# Altium PCB finger_pogo.PcbDoc
Units mil, origin at the board's own origin, x right, y up, seen from the top; angles counter-clockwise.
Board outline 1535 x 780 mil, 2 copper layers (Top Layer, Bottom Layer), stack 60.8 mil thick; 4 components, 6 nets, 16 pads, 10 vias.
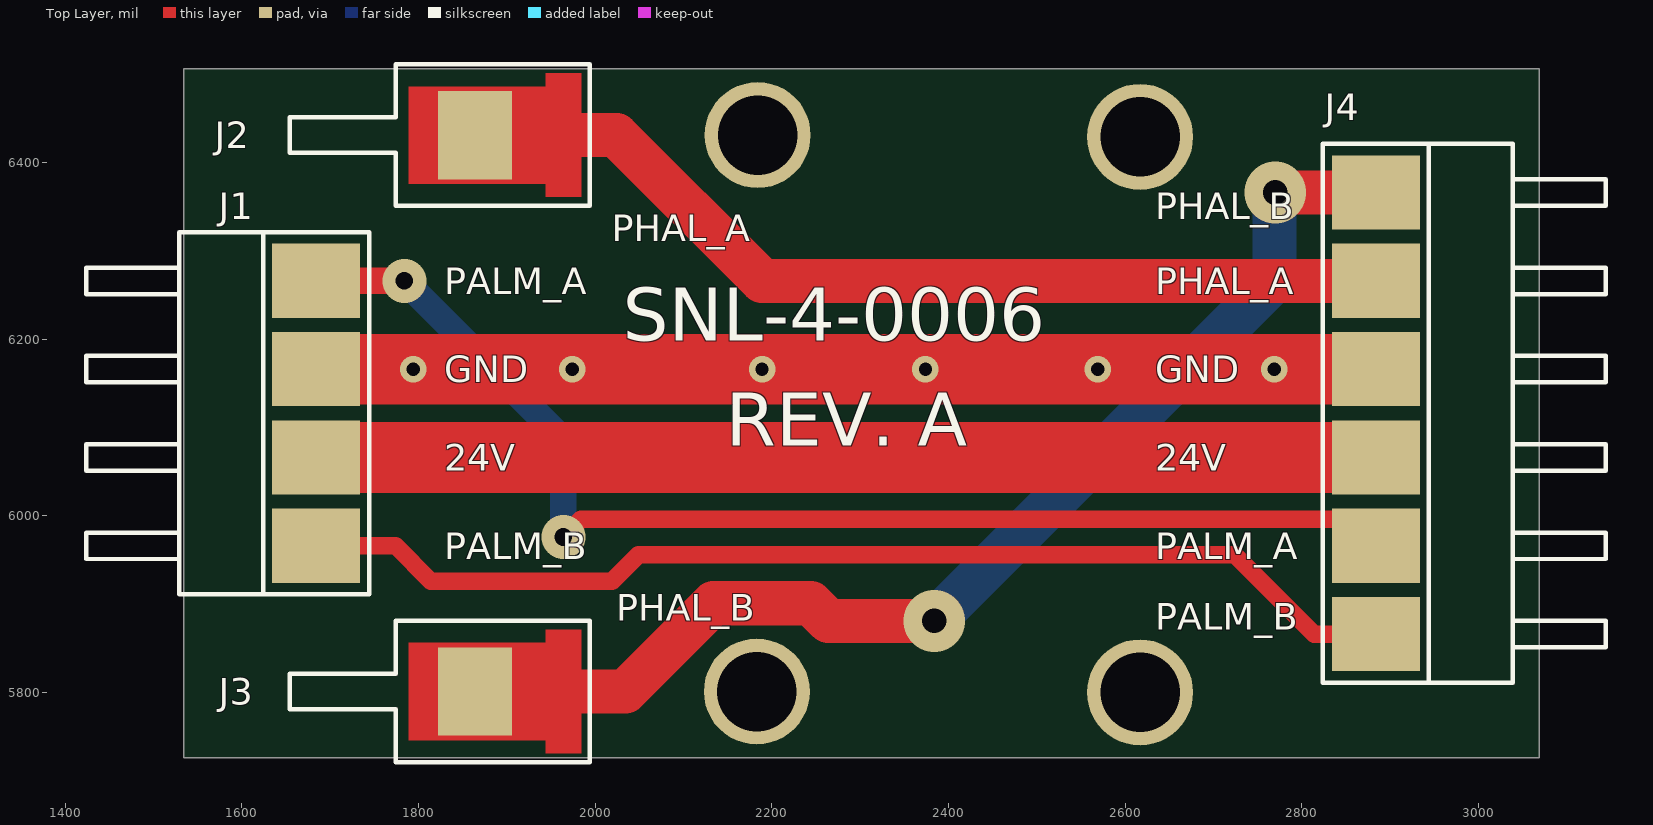
[diagram p0: Top Layer view]
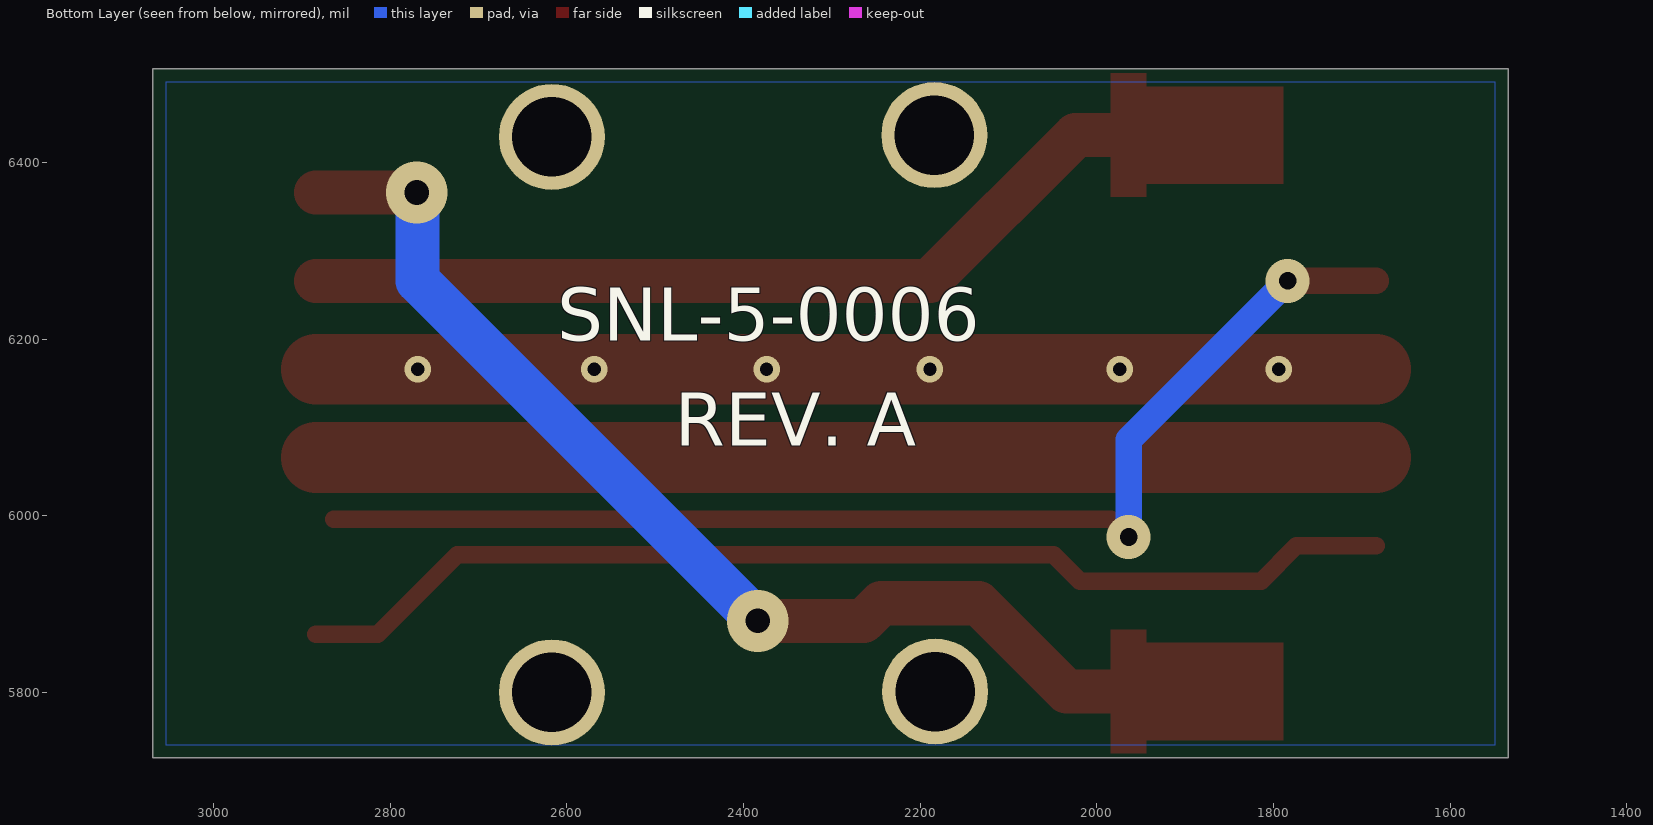
[diagram p1: Bottom Layer view, seen from below]

## Layer stack, top to bottom
Top Layer: signal copper 1.4
Dielectric: core 58, FR-4, Dk 4.8
Bottom Layer: signal copper 1.4

## Board outline
1534,5726 1534,6506 3069,6506 3069,5726

## Design rules (kind name [scope] priority, off if disabled: settings)
Clearance Clearance_1 [InNamedPolygon('gnd')] p1: gap=20
Clearance [All] p2: gap=10
MinimumSolderMaskSliver [All] p1: minsoldermaskwidth=5
PasteMaskExpansion [All] p1: expansion=-1
PlaneConnect [All] p1: planeconnectstyle=Direct reliefexpansion=20 reliefentries=4 reliefconductorwidth=10 reliefairgap=10
PolygonConnect [All] p1: connectstyle=Direct reliefconductorwidth=10 reliefentries=4 polygonreliefangle="90 Angle" airgapwidth=10
RoutingVias [All] p1: holewidth=8 width=20 viastyle="Through Hole" minholewidth=8 minwidth=20 maxholewidth=100 maxwidth=120
SilkToSilkClearance [All] p1: silktosilkclearance=5
SilkscreenOverComponentPads [All] p1: minsilkscreentomaskgap=5
SolderMaskExpansion [All] p1: expansion=3
Width [All] p1: maxlimit=100 minlimit=10 preferedwidth=10
23 further rules are at their usual default settings.

## Components (designator, comment, footprint, x,y, rotation, side; value= is the part's Value field where it differs from the comment)
J1 "Header 4" MILL-MAX-810-22-004-40-001101 1684,5966 r90 top
J2 "Plug" MILL_MAX-0967-0-15-20-75-14-11-0_6937-X 1984,6431 r180 top
J3 "Plug" MILL_MAX-0967-0-15-20-75-14-11-0_6937-X 1984.02,5801 r180 top
J4 "Header 6" MILL-MAX-810-22-006-40-001101 2884,6366 r270 top

## Footprints (in the part's own frame and the unit in brackets; to place one, negate y for a bottom-side part, rotate by r counter-clockwise, add the part's x,y. Pads: shape width x height; smd on the part's side, far side on the other; paste and mask are expansions set on the pad)
MILL-MAX-810-22-004-40-001101 [mil]
  rect 84x100 smd: 1(0,0) 2(100,0) 3(200,0) 4(300,0)
  silkscreen extent -55,-60 355,260, body extent -50,-37 350,260, height 100
MILL-MAX-810-22-006-40-001101 [mil]
  rect 84x100 smd: 1(0,0) 2(100,0) 3(200,0) 4(300,0) 5(400,0) 6(500,0)
  silkscreen extent -55,-60 555,260, body extent -50,-40 550,257, height 100
MILL_MAX-0967-0-15-20-75-14-11-0_6937-X [mil]
  rect 84x100 smd: 1(120,0)
  Top Layer region: 0,70 40,70 40,55 195,55 195,-55 40,-55 40,-70 0,-70
  silkscreen extent -10,-80 330,80, body extent -1,-77 330,77, height 100

## Part data
J1: "Header, 4-Pin"
J4: "Header, 6-Pin"

## Free pads (board coordinates)
  round 120 hole 90: MNT(2183,5801) MNT(2184,6431) MNT(2617,5800) MNT(2617,6429)

## Via types
v1: diameter 30, hole 15, Top Layer to Bottom Layer, tented both sides, 6 vias
v2: diameter 70, hole 28, Top Layer to Bottom Layer, tented both sides, 2 vias
v3: diameter 50, hole 20, Top Layer to Bottom Layer, tented both sides, 2 vias

## Nets (pads, with @x,y where several pads share a name; then routed paths per layer and width w, separated by ;. In a path a pad name is that pad's centre, name@x,y a point inside that pad or via, vN(x,y) a via of type N, cw(c..) or ccw(c..) an arc to the next point about the centre after c; other vN are vias at no path point)
24V: 
GND: 
PALM_A: 
PALM_B: 
PHAL_A: 
PHAL_B: 
pads on no net: J1.1 J1.2 J1.3 J1.4 J2.1 J3.1 J4.1 J4.2 J4.3 J4.4 J4.5 J4.6
copper on no net: | length 7392.5
  Top Layer w20: 1684,5966 1774,5966 1814,5926 2019,5926 2049,5956 2724,5956 2814,5866 2884,5866 ; v3(1964,5976) 1984,5996 2864,5996
  Top Layer w30: 1684,6266 v3(1784,6266)
  Top Layer w50: 1864,6431 2024,6431 2189,6266 2884,6266 ; 1928,5802 1929,5801 2034,5801 2134,5901 2244,5901 2264,5881 v2(2384,5881) ; v2(2770,6366) 2884,6366
  Top Layer w80: 1684,6066 2884,6066 ; 1684,6166 2884,6166
  Bottom Layer w30: v3(1784,6266) 1964,6086 v3(1964,5976)
  Bottom Layer w50: v2(2384,5881) 2769,6266 2769,6365 v2(2770,6366)
  other v1: 1794,6166 1974,6166 2189,6166 2374,6166 2569,6166 2769,6166

## Polygon pours and split planes (outlines as drawn)
no net on Bottom Layer "gnd" (solid, remove dead copper, pour order 2): 1549,6491 3054,6491 3054,5741 1549,5741

## Silkscreen, mask and mechanical layers (free items; w line width, h text height)
Top Overlay:
  text "PHAL_B" at 2634,6336 h30
  text "PHAL_A" at 2019,6311 h30
  text "PALM_A" at 1829,6251 h30
  text "PHAL_A" at 2634,6251 h30
  text "SNL-4-0006" at 2031,6198 h60
  text "GND" at 1829,6151 h30
  text "GND" at 2634,6151 h30
  text "REV. A" at 2148,6079 h60
  text "24V" at 1829,6051 h30
  text "24V" at 2634,6051 h30
  text "PALM_B" at 1829,5951 h30
  text "PALM_A" at 2634,5951 h30
  text "PHAL_B" at 2024,5881 h30
  text "PALM_B" at 2634,5871 h30
Bottom Overlay:
  text "SNL-5-0006" at 2611,6198 h60
  text "REV. A" at 2478,6079 h60
outline:
  the board outline again, w5
Mechanical 7:
  drawing of 323 lines, arcs and shapes, not listed
border:
  lines w5: 118.42,3889.87 318.42,3889.87 ; 118.42,5769.87 318.42,5769.87 ; 2494.42,141.87 2494.42,341.87 ; 2494.42,7441.87 2494.42,7641.87 ; 3512.25,342.82 3512.25,1542.82 4912.25,1542.82 ; 4866.42,141.87 4866.42,341.87 ; 4866.42,7441.87 4866.42,7641.87 ; 4912.25,342.82 4912.25,1542.82 ; 4912.25,642.82 9412.25,642.82 ; 4912.25,942.82 9412.25,942.82 ; 4912.25,1242.82 6412.25,1242.82 ; 6412.25,342.82 6412.25,942.82 6412.25,1542.82 ; 7243.42,141.87 7243.42,341.87 ; 7243.42,7441.87 7243.42,7641.87 ; 8512.25,342.82 8512.25,942.82 ; 9412.25,1542.82 6412.25,1542.82 ; 9418.42,2017.87 9618.42,2017.87 ; 9418.42,3889.87 9618.42,3889.87 ; 9418.42,5769.87 9618.42,5769.87 ; 4912.25,1542.82 6412.25,1542.82 ; 118.42,141.87 118.42,7641.87 9618.42,7641.87 9618.42,141.87 118.42,141.87 ; 318.42,341.87 9418.42,341.87 9418.42,7441.87 318.42,7441.87 318.42,341.87
  text "1" at 1290.75,7506.87 h70
  text "2" at 3648.77,7506.87 h70
  text "3" at 6025.42,7506.87 h70
  text "4" at 8400.77,7506.87 h70
  text "A" at 193.42,6616.87 h70
  text "A" at 9488.42,6616.87 h70
  text "B" at 193.42,4740.87 h70
  text "B" at 9488.42,4740.87 h70
  text "C" at 193.42,2864.87 h70
  text "C" at 9488.42,2864.87 h70
  text "ENGINEER:" at 4962.25,1442.82 h45
  text "TITLE:" at 6462.25,1442.82 h45
  text "M. Quigley" at 5012.84,1288.88 h100
  text "Finger Pogos" at 6508.91,1271.17 h100
  text "PCB DESIGNER:" at 4962.25,1147.82 h45
  text "M. Quigley" at 5018.75,1011.32 h100
  text "Open Source" at 3814.02,1005.42 h90
  text "D" at 193.42,992.87 h70
  text "D" at 9488.42,992.87 h70
  text "DATE:" at 4962.25,842.82 h45
  text "PART NO.:" at 6462.25,842.82 h45
  text "REV:" at 8562.25,842.82 h45
  text "Robotics Foundation" at 3605.36,838.09 h90
  text ".PRINT_DATE" at 5012.25,722.82 h70
  text "A" at 8605.36,692.43 h100
  text "FILE NAME:" at 4962.25,542.82 h45
  text "DWG NO:" at 6462.25,542.82 h45
  text "SCALE:" at 8562.25,542.82 h45
  text ".PCB_FILE_NAME_NO_PATH" at 5012.25,422.82 h70
  text "none" at 8611.27,403.06 h100
  text "1" at 1290.75,206.87 h70
  text "2" at 3648.77,206.87 h70
  text "3" at 6025.42,206.87 h70
  text "4" at 8400.77,206.87 h70
Drill Drawing:
  text ".legend" at 4184.3,1860.26 h60
fabrication:
  lines w10: 4177,6788.34 6127,6788.34
  text "NOTES: (UNLESS OTHERWISE SPECIFIED)" at 4202,6838.34 h70
  text "1.  ALL DIMENSIONS ARE IN MILLIMETERS UNLESS OTHERWISE NOTED." at 4352,6588.34 h70
  text "2.  FABRICATE PCB IN ACCORDANCE WITH LATEST IPC-6011 AND IPC-6012, CLASS 2." at 4352,6413.34 h70
  text "3.  MATERIALS:" at 4352,6238.34 h70
  text "LAMINATE MATERIAL MUST BE ABLE TO WITHSTAND A LEAD FREE PROFILE." at 4552,6113.34 h70
  text "USE HIGH TEMP FR-4 MATERIAL OR EQUIVALENT." at 4552,5988.34 h70
  text "MUST MEET UL 94V-0 FLAMMABILITY RATING." at 4552,5863.34 h70
  text "COPPER FOIL TO BE IN ACCORDANCE WITH IPC-MF-150, OUTER LAYER 1.0 OZ FINISHED." at 4552,5738.34 h70
  text "OVERALL THICKNESS TO BE .062\" +/- .005\"." at 4552,5613.34 h70
  text "4.  HOLE SIZES IN DRILL CHART ARE FINISHED DIAMETERS, AND IN INCHES." at 4343,5464.83 h70
  text "LAYER TO LAYER REGISTRATION SHALL BE WITHIN 0.003" at 4543,5339.83 h70
  text "ALL HOLES SHALL BE LOCATED WITHIN 0.003 RADIUS OF TRUE POSITION (RTP)." at 4543,5214.83 h70
  text "PLATED-THROUGH HOLES SHALL HAVE A TOLERANCE OF: +0.003/-0.003 FOR HOLE SIZES." at 4543,5089.83 h70
  text "5.  ALL PLATED-THROUGH HOLES AND CONDUCTIVE SURFACES SHALL BE PLATED WITH" at 4343,4914.83 h70
  text "A MINIMUM THICKNESS OF 0.001 COPPER." at 4543,4789.83 h70
  text "6.  FINISH:" at 4343,4614.83 h70
  text "SURFACE FINISH TO BE ELECTROLESS NICKEL/IMMERSION GOLD PER IPC-4552." at 4543,4489.83 h70
  text "NICKEL THICKNESS 120-240 MICROINCHES, GOLD THICKNESS 2.0-8.0 MICROINCHES." at 4543,4364.83 h70
  text "7.  SOLDER MASK:" at 4343,4189.83 h70
  text "GREEN LIQUID PHOTOIMAGEABLE (LPI) SOLDERMASK SHALL BE APPLIED PER" at 4533.16,4054.98 h70
  text "LATEST PC-SM-840, CLASS H, OVER BARE COPPER (SMOBC) TO BOTH SIDES OF THE BOARD." at 4533.16,3929.98 h70
  text "8.  SILKSCREEN:" at 4326.22,3764.06 h70
  text "SHALL BE APPLIED WITH WHITE NON-CONDUCTIVE PERMANENT EPOXY INK." at 4526.22,3639.06 h70
  text "THERE SHALL BE NO SILKSCREEN ON ANY SOLDERABLE COMPONENT PAD." at 4526.22,3514.06 h70
  text "9.  TOLERANCES:" at 4326.22,3339.06 h70
  text "BOW AND TWIST OF THE BOARD SHALL NOT EXCEED 0.75%." at 4526.22,3214.06 h70
  text "CONDUCTOR WIDTHS AND SPACING SHALL BE WITHIN +/-0.002 OF GERBER DATA." at 4526.22,3089.06 h70
  text "REMOVE ALL BURRS AND BREAK SHARP EDGES 0.012 MAX." at 4526.22,2964.06 h70
  text "Fabrication Drawing" at 6508.44,1052.91 h100
  text "SNL-5-0006" at 6493.16,694.39 h100
  text "SNL-5-0006-FAB" at 6487.45,411.44 h100
assembly:
  lines w10: 4174.26,6787.94 6124.26,6787.94
  text "NOTES: (UNLESS OTHERWISE SPECIFIED)" at 4199.26,6837.94 h70
  text "1.  ASSEMBLE BOARD PER IPC-A-610, CLASS 2 MINIMUM USING A LEAD-FREE (ROHS) PROCESS" at 4349.26,6587.94 h70
  text "2.  INDIVIDUALLY PLACE PCA IN ANTI-STATIC BAG PER EIA-525. PROTECT IN SHIPPING" at 4349.26,6412.94 h70
  text "CONTAINER TO PREVENT DAMAGE UNDER NORMAL TRANSPORT AND HANDLING." at 4541.39,6294.05 h70
  text "3.  MATERIAL REQUIREMENTS ARE SPECIFIED ON A SEPARATE BOM. ALTERNATE" at 4353.2,6109.99 h70
  text "MATERIAL SHALL NOT BE USED UNLESS APPROVED IN WRITING." at 4553.2,5984.99 h70
  text "4.  NOTE THAT MOST OF THE POGO PINS EXTEND BEYOND THE OUTLINE OF THE PCB." at 4355,5860 h70
  text "THIS IS BY DESIGN." at 4545.2,5742.99 h70
  text "5.  THERE ARE NO PARTS ON THE BOTTOM OF THE PCB." at 4352,5618 h70
  text "Assembly Drawing" at 6508.44,1045.03 h100
  text "SNL-4-0006" at 6493.16,694.39 h100
  text "SNL-4-0006-ASY" at 6487.45,411.44 h100

## Dimensions
3069,5726 to 2617,5800 on border
3069,5726 to 2617,5800 on border